# EAGLE board arduino_mini_xbee (EAGLE 5.00)

Size 26.67 x 60.33 mm. Coordinates in mm from the lower left corner, seen from the top.
Outline: 0,60.33 26.67,60.33 26.67,0 0,0 0,60.33
Copper layers (1*16): Top 0.035mm / dielectric 1.5mm / Bottom 0.035mm
Design rules "default": minimum track width 10mil, minimum drill 24mil, track to track 8mil, track to pad 8mil, pad to pad 8mil, via to via 8mil, smd to smd 8mil, copper to edge 40mil, drill to drill 8mil, minimum pad ring 10mil, minimum via ring 8mil, stop-mask expansion 4mil, vias tented up to drill 0mil, thermal gap 10mil

## Footprints (pad centres in the part's own frame; a part is rotated, then mirrored left to right if it is on the bottom)
C0805K = smd 1.3 x 1.6: 1 -1,0; 2 1,0
SOIC(D)-14 = smd 0.61 x 1.93: 1 -3.81,-3.076; 2 -2.54,-3.076; 3 -1.27,-3.076; 4 0,-3.076; 5 1.27,-3.076; 6 2.54,-3.076; 7 3.81,-3.076; 8 3.81,3.076; 9 2.54,3.076; 10 1.27,3.076; 11 0,3.076; 12 -1.27,3.076; 13 -2.54,3.076; 14 -3.81,3.076
1X12 = drill 1.016 round: 1 0,0; 2 2.54,0; 3 5.08,0; 4 7.62,0; 5 10.16,0; 6 12.7,0; 7 15.24,0; 8 17.78,0; 9 20.32,0; 10 22.86,0; 11 25.4,0; 12 27.94,0
CHIPLED_0805 = smd 1.2 x 1.2: A 0,-1.05; C 0,1.05
XBEE = drill 0.66 square: 1 -11,9 | drill 0.66 round: 2 -11,7; 3 -11,5; 4 -11,3; 5 -11,1; 6 -11,-1; 7 -11,-3; 8 -11,-5; 9 -11,-7; 10 -11,-9; 11 11,-9; 12 11,-7; 13 11,-5; 14 11,-3; 15 11,-1; 16 11,1; 17 11,3; 18 11,5; 19 11,7; 20 11,9
MINI04_SIDE_PINS_ONLY = drill 1 octagon: +5V@1 7.62,6.35; AD0 7.62,-3.81; AD1 7.62,-1.27; AD2 7.62,1.27; AD3 7.62,3.81; D2 -7.62,3.81; D3 -7.62,1.27; D4 -7.62,-1.27; D5 -7.62,-3.81; D6 -7.62,-6.35; D7 -7.62,-8.89; D8 -7.62,-11.43; D9 -7.62,-13.97; D10 7.62,-13.97; D11 7.62,-11.43; D12 7.62,-8.89; D13 7.62,-6.35; GND@1 -7.62,6.35; GND@2 7.62,11.43; RESET@1 -7.62,8.89; RESET@2 7.62,8.89; RX@1 -7.62,11.43 | drill 1 square: +9V 7.62,13.97; TX@1 -7.62,13.97
R0603 = smd 1 x 1.1: 1 -0.85,0; 2 0.85,0
TO252 = smd 1 x 1.6: 1 -2.28,-4.8; 2 2.28,-4.8 | smd 5.4 x 6.2: 3 0,2.5

## Placement (x,y rotation side)
C1  1µ  [C0805K]  18.41,47.62 0 top
C2  1µ  [C0805K]  8.26,47.62 0 top
IC1  TXB104D  [SOIC(D)-14]  12.06,26.04 270 top
JP1  M12PTH  [1X12]  1.91,29.84 270 top
JP2  M12PTH  [1X12]  24.76,29.84 270 top
L1  [CHIPLED_0805]  23.49,32.39 270 top
L2  [CHIPLED_0805]  23.49,34.93 270 top
L3  [CHIPLED_0805]  3.17,34.93 90 top
M1  XBEE  [XBEE]  13.34,48.9 180 top
M2  MINI04  [MINI04_SIDE_PINS_ONLY]  13.34,15.88 0 top
R1  10k  [R0603]  17.14,19.68 270 top
R2  1k  [R0603]  19.68,34.93 180 top
R3  1k  [R0603]  6.99,34.93 0 top
U$1  LP38691DT  [TO252]  13.34,52.71 0 top

## Library data of the parts
C1 C2 R1-R3 = rcl
IC1 = ti_txb0104
JP1 JP2 = SparkFun
L1-L3 = led
M1 = xbee_r1
M2 = arduino
U$1 = national_lp38691

## Nets
+3V3: C2.1 IC1.14 M1.1 R1.2 U$1.1
+5V: C1.1 IC1.1 JP2.4 M2.+5V@1 U$1.3
GND: C1.2 C2.2 IC1.7 JP1.4 JP2.2 L1.C L2.C L3.C M1.10 M2.GND@1 M2.GND@2 U$1.2
N$1: IC1.8 R1.1
N$2: JP1.3 M2.RESET@1
N$3: L2.A R2.1
N$4: M1.6 R2.2
N$5: M1.13 R3.2
N$6: L3.A R3.1
N$7: IC1.13 M1.3
N$8: JP1.5 M2.D2
N$9: JP1.6 M2.D3
N$10: JP1.7 M2.D4
N$11: JP1.8 M2.D5
N$12: JP1.9 M2.D6
N$13: JP1.10 M2.D7
N$14: JP1.11 M2.D8
N$15: JP1.12 M2.D9
N$16: JP2.1 M2.+9V
N$17: IC1.12 M1.2
N$18: JP2.3 M2.RESET@2
N$19: JP2.5 M2.AD3
N$20: JP2.6 M2.AD2
N$21: JP2.7 M2.AD1
N$22: JP2.8 M2.AD0
N$23: JP2.9 L1.A M2.D13
N$24: JP2.10 M2.D12
N$25: JP2.11 M2.D11
N$26: JP2.12 M2.D10
TO_RX: IC1.2 JP1.1 M2.TX@1
TO_TX: IC1.3 JP1.2 M2.RX@1

## Tracks (layer width: path | path; a pad name or v marks a point on that pad's centre or on a via)
+3V3  (4 unrouted)
+5V  (4 unrouted)
GND  (11 unrouted)
N$1  (1 unrouted)
N$2  (1 unrouted)
N$3  (1 unrouted)
N$4  (1 unrouted)
N$5  (1 unrouted)
N$6  (1 unrouted)
N$7  (1 unrouted)
N$8  (1 unrouted)
N$9  (1 unrouted)
N$10  (1 unrouted)
N$11  (1 unrouted)
N$12  (1 unrouted)
N$13  (1 unrouted)
N$14  (1 unrouted)
N$15  (1 unrouted)
N$16  (1 unrouted)
N$17  (1 unrouted)
N$18  (1 unrouted)
N$19  (1 unrouted)
N$20  (1 unrouted)
N$21  (1 unrouted)
N$22  (1 unrouted)
N$23  (2 unrouted)
N$24  (1 unrouted)
N$25  (1 unrouted)
N$26  (1 unrouted)
TO_RX  (2 unrouted)
TO_TX  (2 unrouted)